# Altium PCB MICRO-USB-1_2021-12-16.pcbdoc
Units mm, origin at the board's own origin, x right, y up, seen from the top; angles counter-clockwise.
Board outline 33.48 x 34.39 mm, 2 copper layers (Top Layer, Bottom Layer); 1 components, 0 nets, 11 pads, 0 vias.
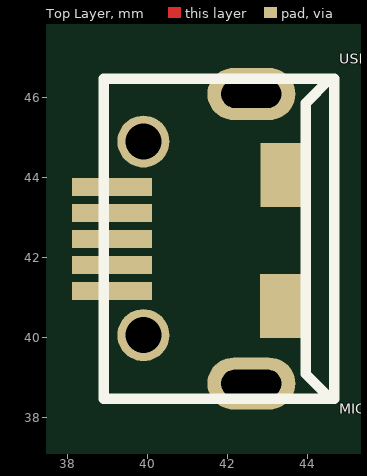
[diagram p0: Top Layer view]
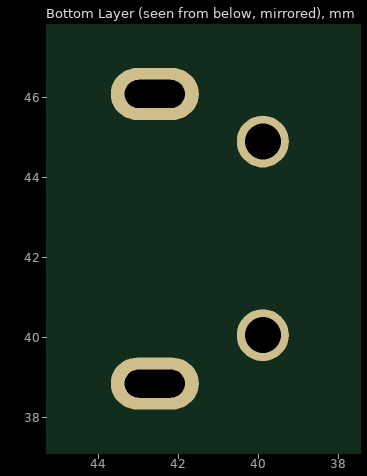
[diagram p1: Bottom Layer view, seen from below]

## Layer stack, top to bottom
Top Layer: signal copper (thickness not stored)
Dielectric: dielectric 0.32, FR-4, Dk 4.8
Bottom Layer: signal copper (thickness not stored)

## Board outline
58.879,25.4 25.4,25.4 25.4,59.793 58.879,59.793

## Components (designator, comment, footprint, x,y, rotation, side; value= is the part's Value field where it differs from the comment)
USB? "MICRO-USB-1" MICRO-USB-1 41.441,42.47 r0 top

## Footprints (in the part's own frame and the unit in brackets; to place one, negate y for a bottom-side part, rotate by r counter-clockwise, add the part's x,y. Pads: shape width x height; smd on the part's side, far side on the other; paste and mask are expansions set on the pad)
MICRO-USB-1 [mm]
  round 1.3 hole 0.9: 0(-1.556,-2.41) 0(-1.556,2.431)
  oval 2.2x1.3 hole 0.7 slot 1.5 at 0 deg: 0(1.144,-3.619) 0(1.144,3.619)
  rect 1.2x1.6 smd: 0(1.955,-1.683) 0(1.971,1.596)
  rect 2x0.45 smd: 1(-2.341,-1.31) 2(-2.341,-0.66) 3(-2.341,-0.01) 4(-2.341,0.64) 5(-2.341,1.29)
  silkscreen extent -2.55,-4 3.21,4

## Nets (pads, with @x,y where several pads share a name; then routed paths per layer and width w, separated by ;. In a path a pad name is that pad's centre, name@x,y a point inside that pad or via, vN(x,y) a via of type N, cw(c..) or ccw(c..) an arc to the next point about the centre after c; other vN are vias at no path point)
pads on no net: USB?.0 USB?.1 USB?.2 USB?.3 USB?.4 USB?.5

## Silkscreen, mask and mechanical layers (free items; w line width, h text height)
Document:
  lines w0.003: 42.114,42.571 42.165,42.622